# EAGLE board powertouch_pcb (EAGLE 9.6.2)
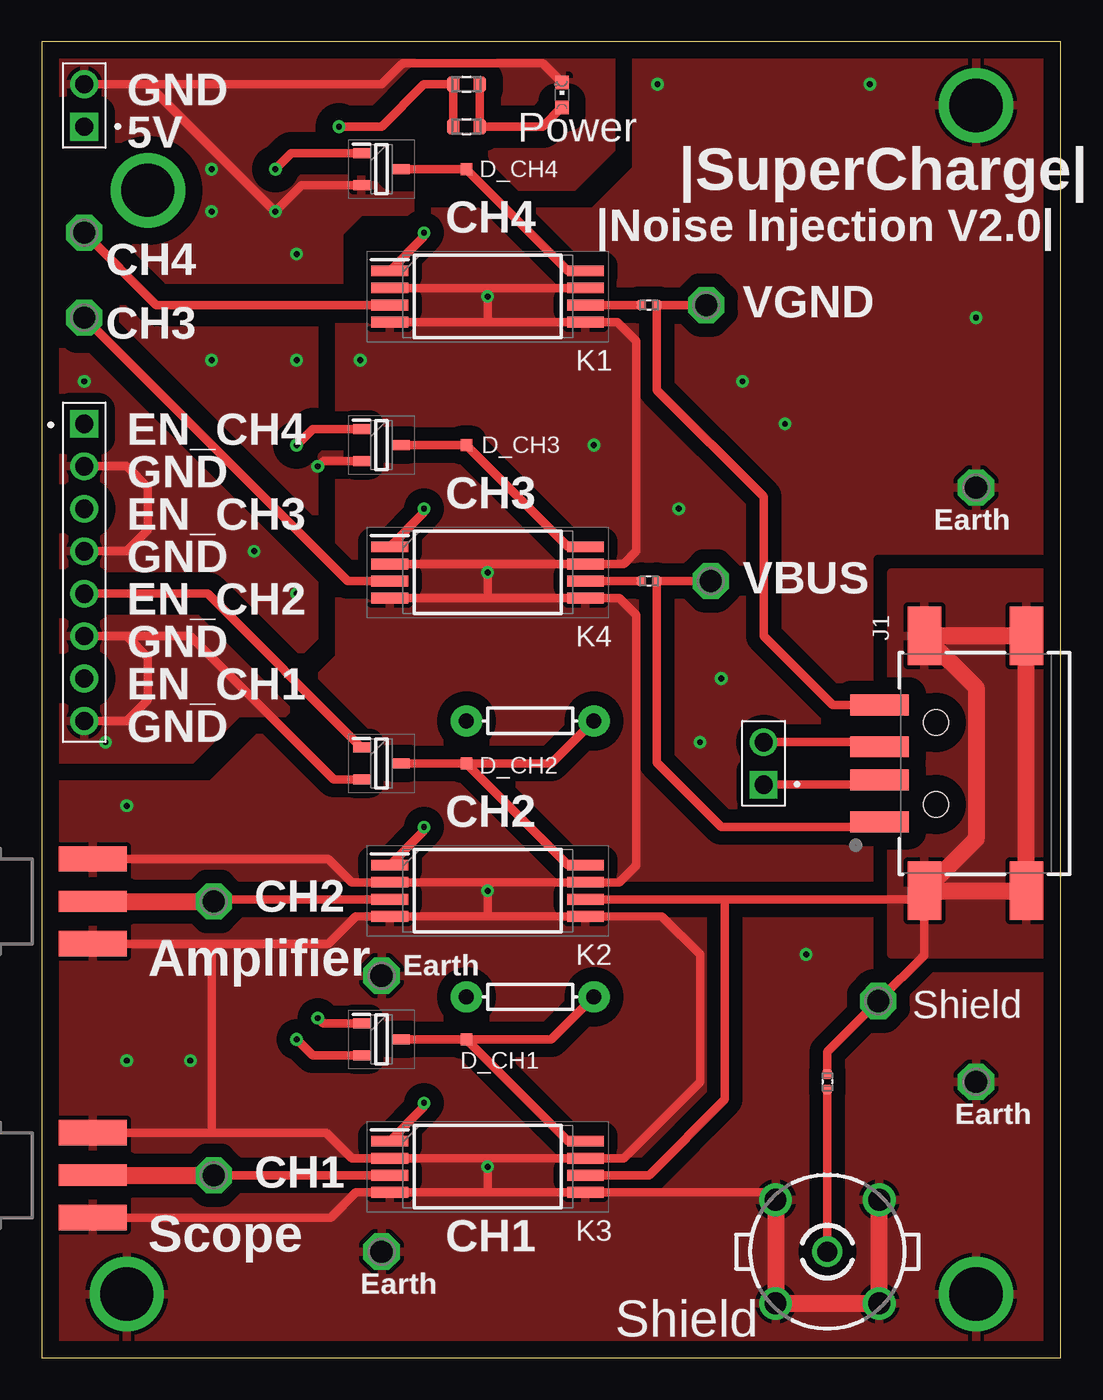
[diagram p0: board, top side]
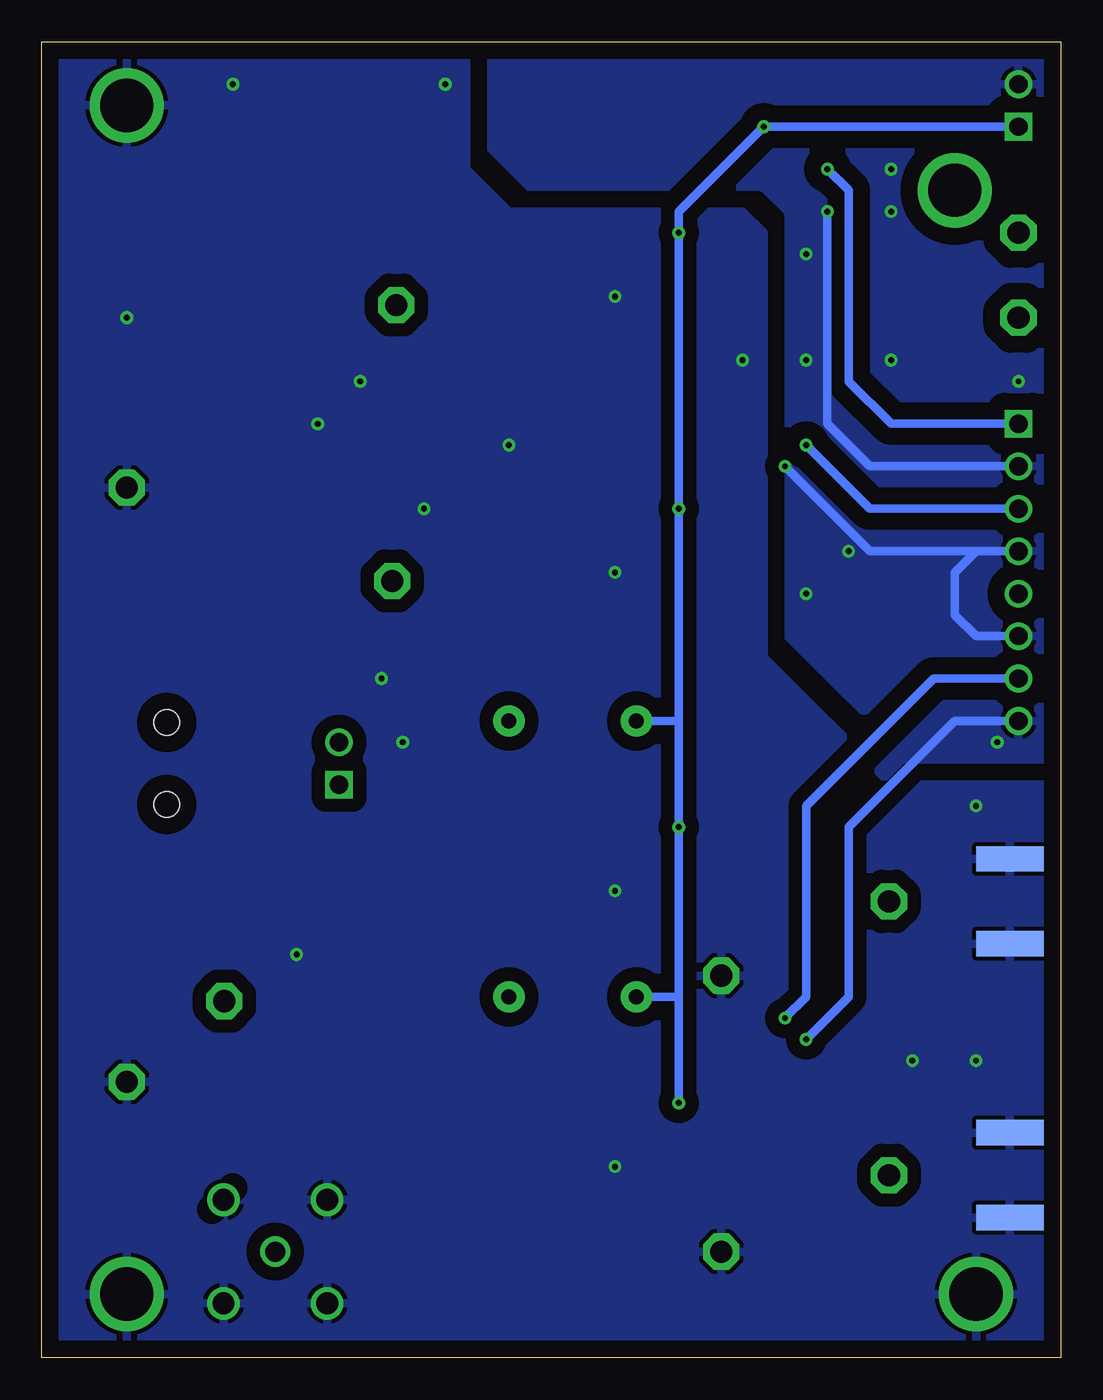
[diagram p1: board, bottom side, seen from below]

Size 60.96 x 78.74 mm. Coordinates in mm from the lower left corner, seen from the top.
Outline: 0,0 60.96,0 60.96,78.74 0,78.74 0,0
Copper layers (1*16): Top 0.035mm / dielectric 1.5mm / Bottom 0.035mm
Design rules "default": minimum track width 6mil, minimum drill 0.35mm, track to track 6mil, track to pad 6mil, pad to pad 6mil, via to via 6mil, smd to smd 6mil, copper to edge 40mil, drill to drill 6mil, minimum pad ring 10mil, minimum via ring 8mil, stop-mask expansion 4mil, vias tented up to drill 0mil, thermal gap 10mil

## Footprints (pad centres in the part's own frame; a part is rotated, then mirrored left to right if it is on the bottom)
SOT96P237X111-3N = smd 1 x 0.6: 1 -1.2,0.955; 2 -1.2,-0.955; 3 1.2,0
629104190121 = smd 1.25 x 3.5: 1 -3.5,6.28; 2 -1,6.28; 3 1,6.28; 4 3.5,6.28 | smd 3.5 x 2: S1 -7.625,3.6; S2 7.625,3.6; S3 -7.625,-2.5; S4 7.625,-2.5 | hole 1.5: -2.45,2.9; 2.45,2.9
61300811121 = drill 1.1 square: 1 -8.89,0 | drill 1.1: 2 -6.35,0; 3 -3.81,0; 4 -1.27,0; 5 1.27,0; 6 3.81,0; 7 6.35,0; 8 8.89,0
61300211121 = drill 1.1 square: 1 -1.27,0 | drill 1.1: 2 1.27,0
SOP102P1295X457-8N = smd 2.2 x 0.65: 1 -5.85,1.53; 2 -5.85,0.51; 3 -5.85,-0.51; 4 -5.85,-1.53; 5 5.85,-1.53; 6 5.85,-0.51; 7 5.85,0.51; 8 5.85,1.53
CHIPLED_0603 = smd 0.8 x 0.8: A 0,-0.75; C 0,0.75
BEAGLEBONEBLACK_MOUNTING_HOLE = drill 3.175 pad 4.445: P$1 0,0
RES_0603 = smd 0.74 x 0.93: 1 -0.795,0; 2 0.795,0
RES_0402 = smd 0.58 x 0.58: 1 -0.46,0; 2 0.46,0
AXIAL-0.3 = drill 0.9 pad 1.88: P$1 -3.81,0; P$2 3.81,0
TESTPAD_P1-13 = drill 1.321 pad 2.159 octagon: TP 0,0
TESTPAD_TP07SQ = smd 0.7 x 0.7: TP 0,0
SMA_EDGELAUNCH = smd 4.064 x 1.524: GND@1 2.032,-2.54; GND@2 2.032,2.54 | smd 4.064 x 1.524 bottom: GND@3 2.032,2.54; GND@4 2.032,-2.54 | smd 4.064 x 1.27: P 2.032,0
B35N61 = drill 1.2: 1 0,0 | drill 1.3: 2 3.099,3.099; 3 -3.099,3.099; 4 -3.099,-3.099; 5 3.099,-3.099

## Placement (x,y rotation side)
IC1  SZNUD3160LT1G  [SOT96P237X111-3N]  20.32,71.12 0 top
IC2  SZNUD3160LT1G  [SOT96P237X111-3N]  20.32,35.56 0 top
IC3  SZNUD3160LT1G  [SOT96P237X111-3N]  20.32,19.05 0 top
IC4  SZNUD3160LT1G  [SOT96P237X111-3N]  20.32,54.61 0 top
J1  629104190121  [629104190121]  56.39,35.56 90 top
J2  61300811121  [61300811121]  2.54,46.99 270 top
J3  61300211121  [61300211121]  2.54,74.93 90 top
J4  61300211121  [61300211121]  43.18,35.56 90 top
K1  9814-05-00  [SOP102P1295X457-8N]  26.67,63.5 0 top
K2  9814-05-00  [SOP102P1295X457-8N]  26.67,27.94 0 top
K3  9814-05-00  [SOP102P1295X457-8N]  26.67,11.43 0 top
K4  9814-05-00  [SOP102P1295X457-8N]  26.67,46.99 0 top
LED1  [CHIPLED_0603]  31.11,75.56 0 top
MGT1  BEAGLEBONEBLACK_MOUNTING_HOLE  [BEAGLEBONEBLACK_MOUNTING_HOLE]  5.08,3.81 0 top
MGT2  BEAGLEBONEBLACK_MOUNTING_HOLE  [BEAGLEBONEBLACK_MOUNTING_HOLE]  55.88,3.81 0 top
MGT3  BEAGLEBONEBLACK_MOUNTING_HOLE  [BEAGLEBONEBLACK_MOUNTING_HOLE]  55.88,74.93 0 top
MGT4  BEAGLEBONEBLACK_MOUNTING_HOLE  [BEAGLEBONEBLACK_MOUNTING_HOLE]  6.35,69.85 0 top
R1  RC0603JR-070RL  [RES_0603]  25.4,76.2 0 top
R2  RC0603JR-070RL  [RES_0603]  25.4,73.66 0 top
R3  RC0402JR-070RL  [RES_0402]  46.99,16.51 270 top
R4  RC0402JR-070RL  [RES_0402]  36.32,62.99 0 top
R5  RC0402JR-070RL  [RES_0402]  36.32,46.48 0 top
R6  10M  [AXIAL-0.3]  29.21,38.1 180 top
R7  10M  [AXIAL-0.3]  29.21,21.59 180 top
TP1  TESTPAD_TPSQPAD1-13  [TESTPAD_P1-13]  39.75,62.99 0 top
TP2  TESTPAD_TPSQPAD1-13  [TESTPAD_P1-13]  40.01,46.48 0 top
TP3  TESTPAD_TPSQPAD1-13  [TESTPAD_P1-13]  50.04,21.34 0 top
TP4  TESTPAD_TPSQPAD1-13  [TESTPAD_P1-13]  10.29,10.92 0 top
TP5  TESTPAD_TPSQPAD1-13  [TESTPAD_P1-13]  10.29,27.3 0 top
TP6  TESTPAD_TPSQTP07SQ  [TESTPAD_TP07SQ]  25.4,35.56 0 top
TP7  TESTPAD_TPSQTP07SQ  [TESTPAD_TP07SQ]  25.4,19.05 0 top
TP8  TESTPAD_TPSQTP07SQ  [TESTPAD_TP07SQ]  25.4,71.12 0 top
TP9  TESTPAD_TPSQTP07SQ  [TESTPAD_TP07SQ]  25.4,54.61 0 top
TP10  TESTPAD_TPSQPAD1-13  [TESTPAD_P1-13]  2.54,67.31 0 top
TP11  TESTPAD_TPSQPAD1-13  [TESTPAD_P1-13]  2.54,62.23 0 top
TP12  TESTPAD_TPSQPAD1-13  [TESTPAD_P1-13]  20.32,6.35 0 top
TP13  TESTPAD_TPSQPAD1-13  [TESTPAD_P1-13]  20.32,22.86 0 top
TP14  TESTPAD_TPSQPAD1-13  [TESTPAD_P1-13]  55.88,16.51 0 top
TP15  TESTPAD_TPSQPAD1-13  [TESTPAD_P1-13]  55.88,52.07 0 top
X1  [SMA_EDGELAUNCH]  1.02,10.92 0 top
X2  [SMA_EDGELAUNCH]  1.02,27.3 0 top
X3  BN35N61  [B35N61]  46.99,6.35 0 top

## Library data of the parts
IC1-IC4 = SamacSys_Parts; ARROW_PART_NUMBER: SZNUD3160LT1G; ARROW_PRICE-STOCK: https://www.arrow.com/en/products/sznud3160lt1g/on-semiconductor?region=nac; DESCRIPTION: MOSFET Power Driver, 272mA, 3-pin SOT-23; HEIGHT: 1.11mm; MANUFACTURER_NAME: ON Semiconductor; MANUFACTURER_PART_NUMBER: SZNUD3160LT1G; MOUSER_PART_NUMBER: 863-SZNUD3160LT1G; MOUSER_PRICE-STOCK: https://www.mouser.co.uk/ProductDetail/onsemi/SZNUD3160LT1G?qs=3PKVEWFFm2%252BNTcSrPn9lDQ%3D%3D
J1 = Wurth_Connectors_WR-USB; APPLICATION: USB 2.0; DATASHEET-URL: https://www.we-online.com/catalog/datasheet/629104190121.pdf; GERDER: Receptacle; INTERFACE-TYPE: Type A; IR1: 1.5A; MOUNT: SMT; PACKAGING: Tape and Reel & Mylar; PART-NUMBER: 629104190121; PINS: 4; TYPE: Horizontal - Short Type; WORKING-VOLTAGE: 30V(AC)
J2 = Headers; CREATED_BY: PCBLayout.com; DIGI_KEY_PART_NUMBER: 732-5321-ND; MANUFACTURER: Wurth Electronics Inc.; MPN: 61300811121
J3 J4 = Headers; CREATED_BY: PCBLayout.com; DIGI_KEY_PART_NUMBER: 732-5315-ND; MANUFACTURER: Wurth Electronics Inc.; MPN: 61300211121
K1-K4 = SamacSys_Parts; DESCRIPTION: COTO TECHNOLOGY - 9814-05-00 - RELAY, REED, SPST-NO, 100V, 0.25A, SMD; HEIGHT: 4.57mm; MANUFACTURER_NAME: Coto Technology; MANUFACTURER_PART_NUMBER: 9814-05-00; MOUSER_PART_NUMBER: 816-9814-05-00; MOUSER_PRICE-STOCK: https://www.mouser.co.uk/ProductDetail/Coto-Technology/9814-05-00?qs=%252B2t8avA00rveEvUcfOyPJA%3D%3D
LED1 X1 X2 = adafruit
MGT1-MGT4 = BeagleBone_Black_Wireless
R1 R2 = Resistor_Capacitor; CREATED_BY: PCBLayout.com; DIGIKEY_PART_NUMBER: 311-0.0GRTR-ND; MANUFACTURER: Yageo; MPN: RC0603JR-070RL; PACKAGE: SMD 0603
R3-R5 = Resistor_Capacitor; CREATED_BY: PCBLayout.com; DIGIKEY_PART_NUMBER: 311-0.0JRTR-ND; MANUFACTURER: Yageo; MPN: RC0402JR-070RL; PACKAGE: SMD 0402
R6 R7 = SparkFun-Resistors; PROD_ID: RES-09327
TP1-TP15 = BeagleBone_Blue_R3
X3 = con-coax; OC_FARNELL: unknown; OC_NEWARK: unknown

## Nets
AMPLIFIER: K2.3 TP5.TP X2.P
EGND: K1.2 K1.4 K1.5 K1.7 K2.2 K2.4 K2.5 K2.7 K3.2 K3.4 K3.5 K3.7 K4.2 K4.4 K4.5 K4.7 MGT1.P$1 MGT2.P$1 MGT3.P$1 TP12.TP TP13.TP TP14.TP TP15.TP X1.GND@1 X1.GND@2 X1.GND@3 X1.GND@4 X2.GND@1 X2.GND@2 X2.GND@3 X2.GND@4 X3.2 X3.3 X3.4 X3.5
GND: IC1.2 IC2.2 IC3.2 IC4.2 J2.2 J2.4 J2.6 J2.8 J3.2 LED1.C
N$1: K1.3 TP10.TP
N$2: K4.3 TP11.TP
N$4: IC3.3 K3.8 R7.P$1 TP7.TP
N$5: IC2.3 K2.8 R6.P$1 TP6.TP
N$6: IC3.1 J2.7
N$7: IC4.3 K4.8 TP9.TP
N$8: IC2.1 J2.5
N$9: IC1.3 K1.8 TP8.TP
N$10: IC1.1 J2.1
N$11: J1.3 J4.2
N$12: IC4.1 J2.3
N$15: J1.2 J4.1
N$16: LED1.A R1.2 R2.2
N$17: K1.6 R4.1
N$18: K4.6 R5.1
N$19: R3.2 X3.1
SCOPE: K3.3 TP4.TP X1.P
SHIELD: J1.S1 J1.S2 J1.S3 J1.S4 K2.6 K3.6 R3.1 TP3.TP
VBUS: J1.1 R5.2 TP2.TP
VCC: J3.1 K1.1 K2.1 K3.1 K4.1 R1.1 R2.1 R6.P$2 R7.P$2
VGND: J1.4 R4.2 TP1.TP

## Tracks (layer width: path | path; a pad name or v marks a point on that pad's centre or on a via)
AMPLIFIER
  Top 0.508: K2.3 10.41,27.43 TP5.TP
  Top 1.016: X2.P TP5.TP
EGND  (via drill 0.35)
  Top 0.508: 10.16,24.77 17.14,24.77 18.79,26.41 K2.4 26.67,26.41 | 10.16,24.77 X2.GND@4 | X2.GND@3 17.14,29.84 18.54,28.45 K2.2 26.67,28.45 | X1.GND@3 10.16,13.46 | 10.16,13.46 17.02,13.46 18.54,11.94 K3.2 26.67,11.94 | X1.GND@4 17.27,8.38 18.79,9.9 K3.4 26.67,9.9 | 26.67,28.45 K2.7 34.54,28.45 35.56,29.46 35.56,44.45 34.55,45.46 K4.5 26.67,45.46 | 26.67,26.41 K2.5 37.09,26.41 39.37,24.13 39.37,16.51 34.8,11.94 K3.7 26.67,11.94 | 26.67,9.9 K3.5 43.44,9.9 X3.3 | 26.67,9.9 26.67,11.94 | 26.67,26.41 26.67,28.45 | 10.16,24.77 10.16,13.46 | K4.4 26.67,45.46 | K4.2 26.67,47.5 | 26.67,47.5 K4.7 34.8,47.5 35.56,48.26 35.56,60.83 34.42,61.97 K1.5 26.67,61.97 | 26.67,45.46 26.67,47.5 | K1.4 26.67,61.97 | K1.2 26.67,64.01 | 26.67,64.01 K1.7 | 26.67,61.97 26.67,64.01
  Top 1.016: X3.3 X3.4 X3.5 X3.2
  other vias: 40.64,40.64 39.37,36.83 8.89,17.78 5.08,33.02 5.08,17.78 45.72,24.13 44.45,55.88 41.91,58.42 33.02,54.61 38.1,50.8 26.67,11.43 26.67,46.99 26.67,27.94 26.67,63.5 19.05,59.69 36.83,76.2 49.53,76.2 55.88,62.23
  pour Top (isolate 0.813, rank 2): 0,34.29 10.16,34.29 17.78,41.91 17.78,67.31 19.05,68.58 33.02,68.58 35.56,71.12 35.56,78.74 60.96,78.74 60.96,0 0,0
  pour Bottom (isolate 0.813, rank 2): 0,34.29 10.16,34.29 17.78,41.91 17.78,67.31 19.05,68.58 33.02,68.58 35.56,71.12 35.56,78.74 60.96,78.74 60.96,0 0,0
GND  (via drill 0.35)
  Top 0.508: IC3.2 16.2,18.09 v15.24,19.05 | IC2.2 17.46,34.6 8.89,43.18 5.08,43.18 | 5.08,43.18 J2.6 | IC4.2 16.82,53.66 v16.51,53.34 | IC1.2 15.55,70.17 v13.97,68.58 6.35,76.2 | J3.2 6.35,76.2 | J2.2 5.08,53.34 6.35,52.07 6.35,49.53 5.08,48.26 J2.4 | J2.8 5.08,38.1 6.35,39.37 6.35,41.91 5.08,43.18 | LED1.C 29.96,77.47 21.59,77.47 20.32,76.2 6.35,76.2
  Bottom 0.508: v15.24,19.05 12.7,21.59 12.7,31.75 6.35,38.1 J2.8 | v16.51,53.34 11.43,48.26 5.08,48.26 | v13.97,68.58 13.97,55.88 11.43,53.34 J2.2 | J2.6 5.08,43.18 6.35,44.45 6.35,46.99 5.08,48.26 | 5.08,48.26 J2.4
  other vias: 10.16,68.58 10.16,71.12 10.16,59.69 2.54,58.42 15.24,45.72 12.7,48.26 3.81,36.83 15.24,59.69 15.24,66.04
  pour Top (isolate 1.016, rank 3): 0,78.74 0,34.29 10.16,34.29 17.78,41.91 17.78,67.31 19.05,68.58 33.02,68.58 35.56,71.12 35.56,78.74
  pour Bottom (isolate 1.016, rank 3): 0,78.74 0,34.29 10.16,34.29 17.78,41.91 17.78,67.31 19.05,68.58 33.02,68.58 35.56,71.12 35.56,78.74
N$1
  Top 0.508: TP10.TP 6.86,62.99 K1.3
N$2
  Top 0.508: TP11.TP 18.29,46.48 K4.3
N$4
  Top 0.508: IC3.3 TP7.TP | TP7.TP 31.49,12.96 K3.8 | TP7.TP 30.48,19.05 R7.P$1
N$5
  Top 0.508: IC2.3 TP6.TP | TP6.TP 31.49,29.47 K2.8 | TP6.TP 30.48,35.56 R6.P$1
N$6  (via drill 0.35)
  Top 0.508: IC3.1 16.82,20 v16.51,20.32
  Bottom 0.508: v16.51,20.32 15.24,21.59 15.24,33.02 7.62,40.64 J2.7
N$7
  Top 0.508: IC4.3 TP9.TP 31.49,48.52 K4.8
N$8
  Top 0.508: IC2.1 9.91,45.72 J2.5
N$9
  Top 0.508: IC1.3 TP8.TP 31.49,65.03 K1.8
N$10  (via drill 0.35)
  Top 0.508: IC1.1 14.93,72.08 v13.97,71.12
  Bottom 0.508: v13.97,71.12 12.7,69.85 12.7,58.42 10.16,55.88 J2.1
N$11
  Top 0.508: J4.2 49.84,36.83 J1.3
N$12  (via drill 0.35)
  Top 0.508: IC4.1 16.2,55.56 v15.24,54.61
  Bottom 0.508: v15.24,54.61 11.43,50.8 J2.3
N$15
  Top 0.508: J4.1 49.84,34.29 J1.2
N$16
  Top 0.508: R1.2 R2.2 29.96,73.66 LED1.A
N$17
  Top 0.508: K1.6 R4.1
N$18
  Top 0.508: K4.6 R5.1
N$19
  Top 0.508: R3.2 X3.1
SCOPE
  Top 0.508: K3.3 10.16,10.92
  Top 1.016: X1.P 10.16,10.92 TP4.TP
SHIELD
  Top 0.508: K2.6 40.85,27.43 | 40.85,27.43 52.28,27.43 J1.S1 52.79,24.09 TP3.TP 46.99,18.29 R3.1 | K3.6 36.32,10.92 40.85,15.45 40.85,27.43
  Top 1.016: J1.S1 J1.S3 J1.S4 J1.S2 55.88,40.09 55.88,31.03 J1.S1
  pour Top (isolate 1.016): 50.8,46.99 60.96,46.99 60.96,24.13 50.8,24.13
VBUS
  Top 0.508: TP2.TP R5.2 36.78,35.61 40.64,31.75 49.8,31.75 J1.1
VCC  (via drill 0.35)
  Top 0.508: K3.1 22.86,15 v22.86,15.24 | K2.1 22.86,31.51 v22.86,31.75 | K4.1 22.86,50.56 v22.86,50.8 | K1.1 22.86,67.07 v22.86,67.31 | R2.1 R1.1 22.86,76.2 20.32,73.66 v17.78,73.66
  Bottom 0.508: v22.86,15.24 22.86,21.59 | 22.86,21.59 v22.86,31.75 22.86,38.1 | 22.86,38.1 v22.86,50.8 v22.86,67.31 22.86,68.58 v17.78,73.66 J3.1 | 22.86,21.59 R7.P$2 | 22.86,38.1 R6.P$2
VGND
  Top 0.508: TP1.TP R4.2 36.78,57.91 43.18,51.51 43.18,43.18 47.3,39.06 J1.4
(copper drawn outside any net)
  shapes: Bottom area x1

## Text on the board
tNames: GND | Power | 5V | D_CH4 | |SuperCharge| | CH4 | |Noise Injection V2.0| | CH4 | VGND | CH3 | EN_CH4 | D_CH3 | GND | CH3 | EN_CH3 | Earth | GND | VBUS | EN_CH2 | GND | EN_CH1 | GND | D_CH2 | CH2 | CH2 | Amplifier | Earth | Shield | D_CH1 | Earth | CH1 | Scope | CH1 | Earth | Shield